# Altium PCB machnguon.PcbDoc
Units mm, origin at the board's own origin, x right, y up, seen from the top; angles counter-clockwise.
Board outline 35.56 x 32.38 mm, 2 copper layers (Top Layer, Bottom Layer); 12 components, 6 nets, 33 pads, 0 vias.
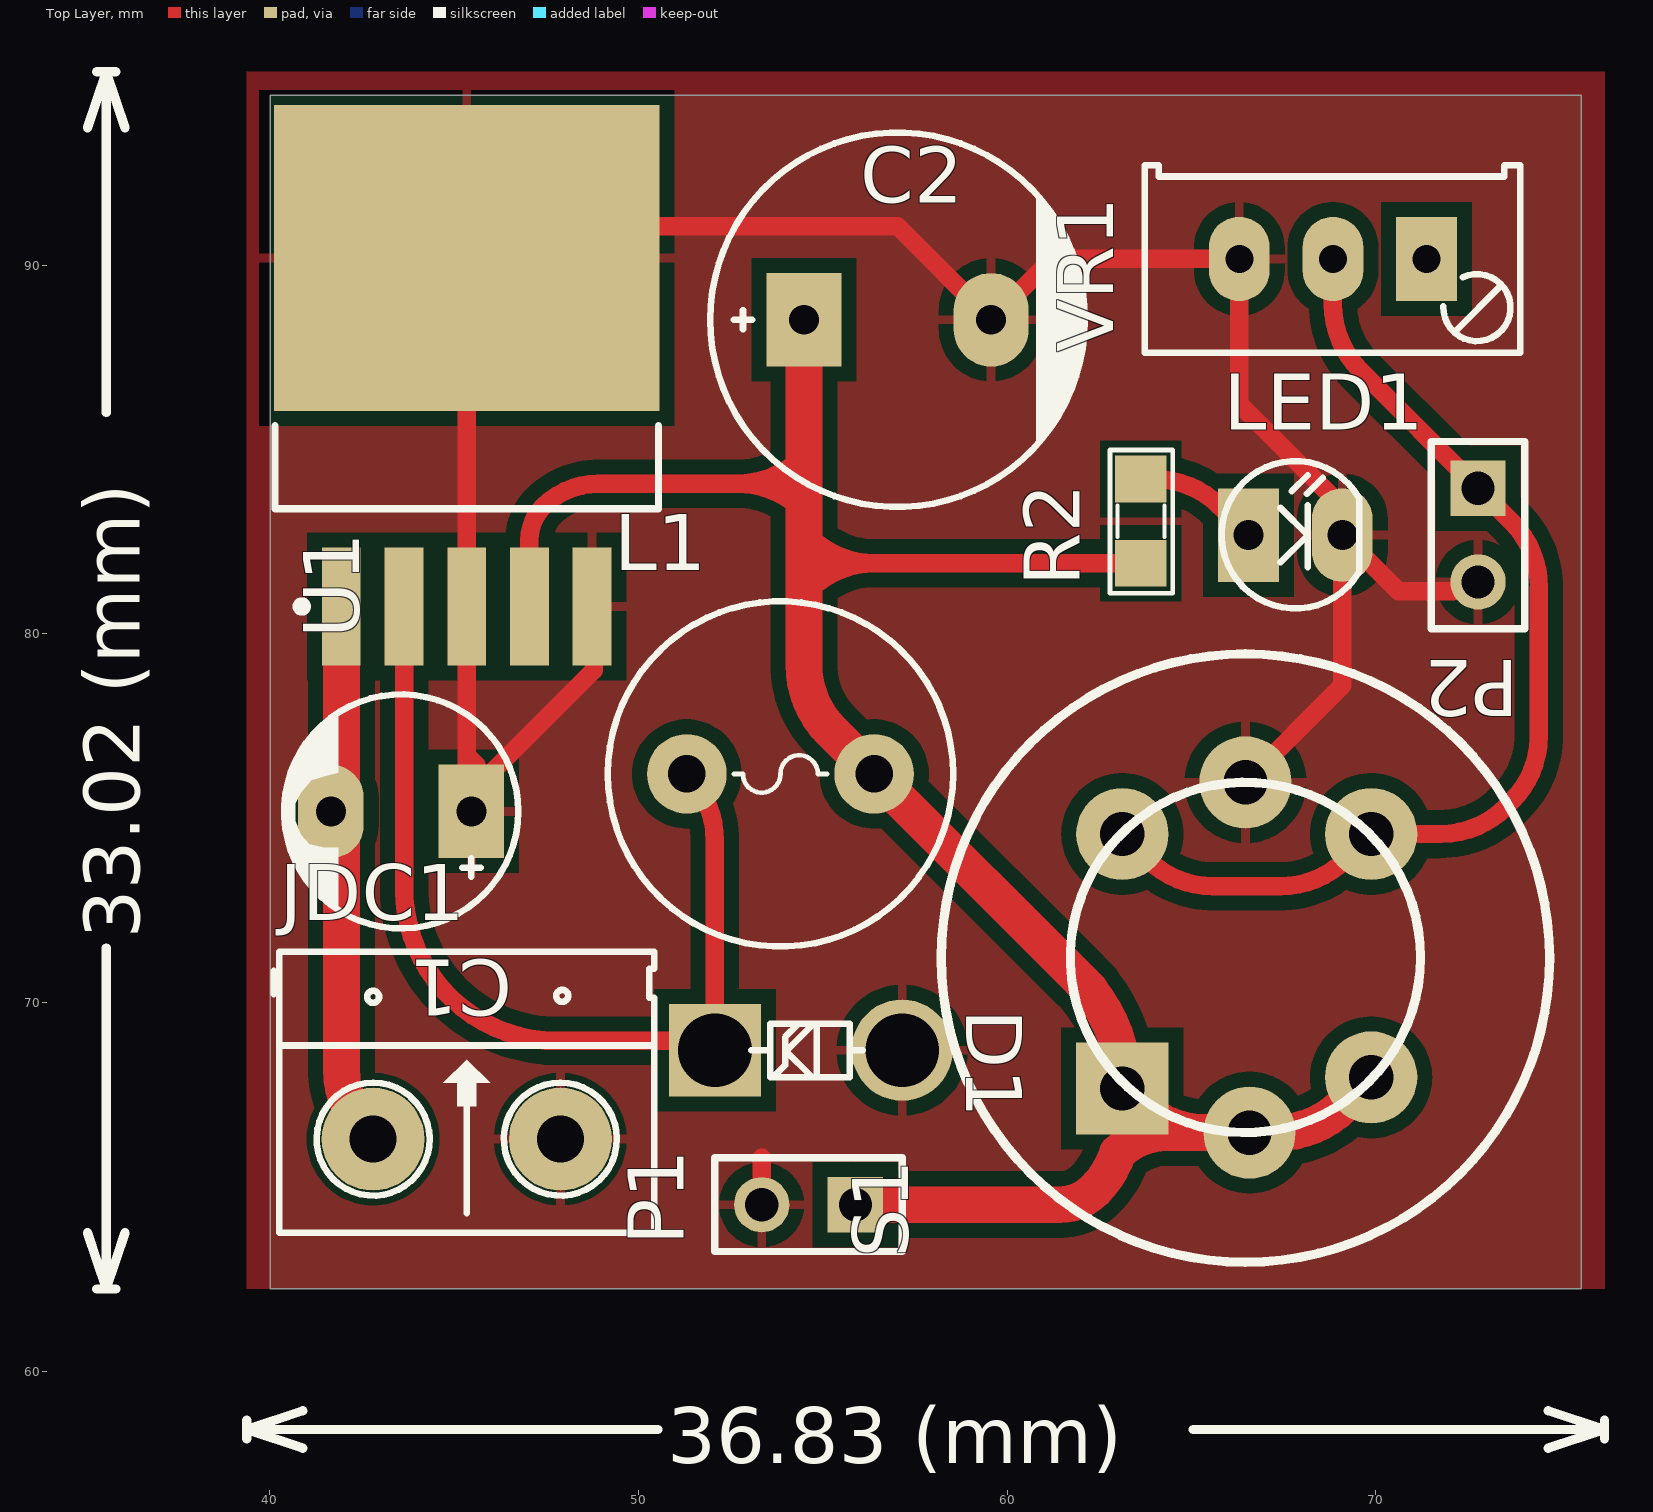
[diagram p0: Top Layer view]
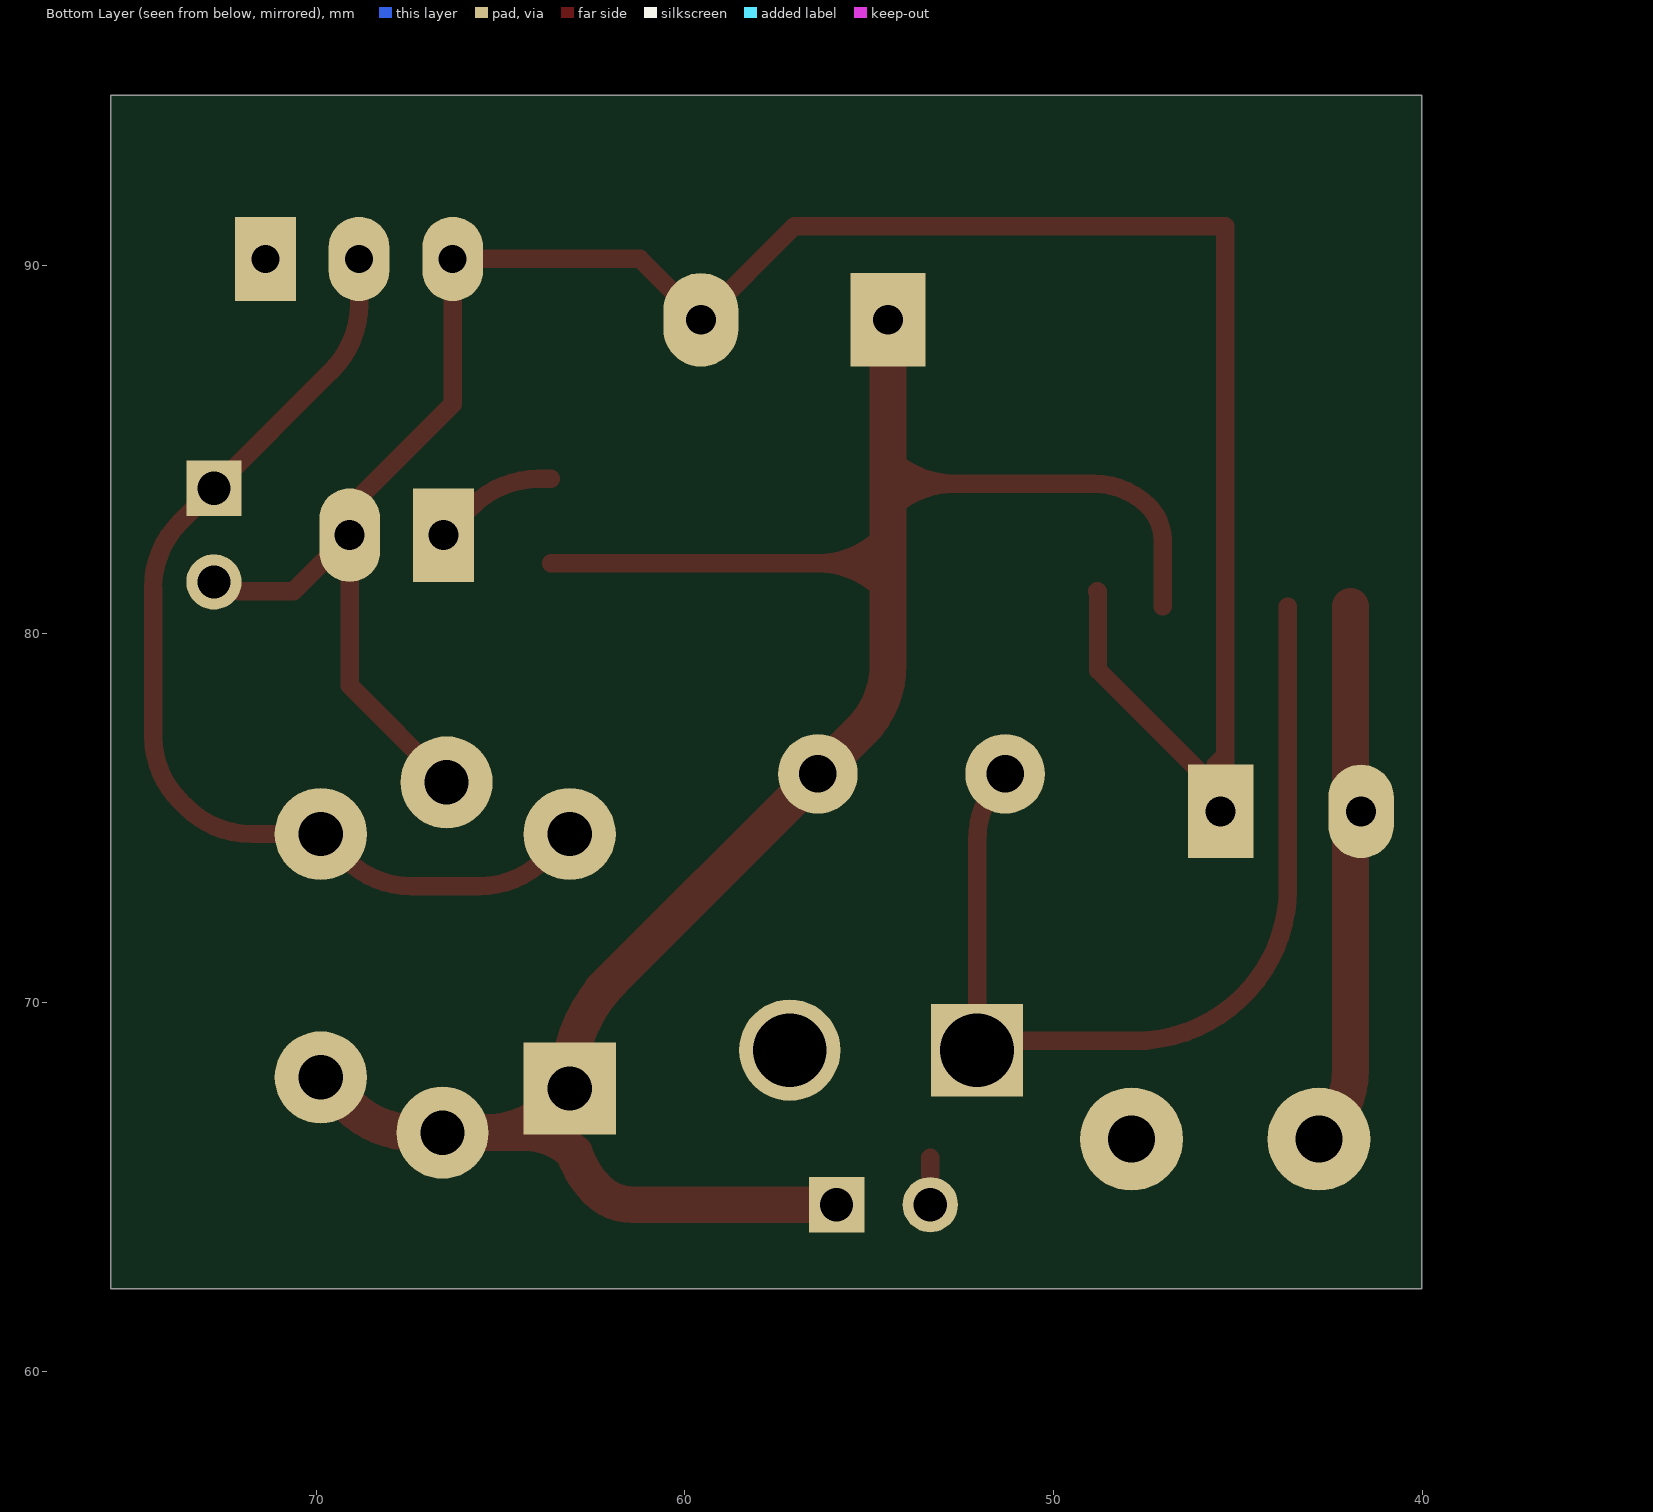
[diagram p1: Bottom Layer view, seen from below]

## Layer stack, top to bottom
Top Layer: signal copper 0.0356
Dielectric: dielectric 0.32, FR-4, Dk 4.8
Bottom Layer: signal copper 0.0356

## Board outline
40.005,94.615 40.005,62.23 75.565,62.23 75.565,94.615

## Design rules (kind name [scope] priority, off if disabled: settings)
Clearance [All] p1: gap=0.4
PolygonConnect [All] p1: connectstyle=Relief reliefconductorwidth=0.254 reliefentries=4 polygonreliefangle="90 Angle"
RoomDefinition machnguon [InComponentClass('machnguon')] p1: confinementstyle=ConfineIn formatcopy=TRUE lockcomponents=FALSE outline 178.943,26.924 281.559,26.924 281.559,46.609 178.943,46.609
RoutingLayers [All] p1: top layer_v5=TRUE bottom layer_v5=FALSE
RoutingVias [All] p1: holewidth=0.711 width=1.27 viastyle="Through Hole" minholewidth=0.711 minwidth=1.27 maxholewidth=0.711 maxwidth=1.27
SilkscreenOverComponentPads [All] p1: minsilkscreentomaskgap=0.254
SolderMaskExpansion [All] p1: expansion=0.102
Width [All] p1: maxlimit=1 minlimit=0.5 preferedwidth=0.5
26 further rules are at their usual default settings.

## Components (designator, comment, footprint, x,y, rotation, side; value= is the part's Value field where it differs from the comment)
C1 "Cap" CP1.5/2.5 45.466,75.184 r180 top
C2 "Cap Pol1" CP2/4 54.483,88.519 r0 top
D1 "1N5822" DZ0.5A 57.15,68.707 r0 top
JDC1 "Header 2" HED2 42.799,66.294 r0 top
L1 "100uH" L01 53.848,76.2 r0 top
LED1 "" LED-3 66.548,82.677 r0 top
P1 "Header 2" HDR1X2 55.88,64.516 r180 top
P2 "Header 2" HDR1X2 72.771,83.947 r270 top
R2 "1k" SM-0805 63.627,83.058 r90 top
S1 "MQ-6" MQ6 66.421,71.12 r90 top
U1 "LM2576T-5.0" TO170P1420-6N 45.339,86.741 r90 top
VR1 "10K" VR1 71.374,90.17 r180 top

## Footprints (in the part's own frame and the unit in brackets; to place one, negate y for a bottom-side part, rotate by r counter-clockwise, add the part's x,y. Pads: shape width x height; smd on the part's side, far side on the other; paste and mask are expansions set on the pad)
CP1.5/2.5 [mil] "Tu hoa 33 >100 uF,50V, 220uF/16V,25V ( it su dung )"
  rect 70x100 hole 32: 1(0,0)
  oval 70x100 hole 32: 2(150,0)
  silkscreen extent -50,-125 200,125, body extent -46,-121 202,127, height 434
CP2/4 [mil] "Tu hoa 1000uF/16V/25V"
  rect 80x100 hole 32: 1(0,0)
  oval 80x100 hole 32: 2(200,0)
  silkscreen extent -100,-200 300,200
DZ0.5A [mm] "Diode Zenner, W 80mil, L 300mil"
  round 2.75 hole 2: 1(0,0)
  rect 2.5x2.5 hole 2: 2(-5.08,0)
  silkscreen extent -4.09,-0.74 -1.07,0.71
HDR1X2 [mm] "Connector; Header; 2 Position"
  rect 1.5x1.5 hole 0.9: 1(0,0)
  round 1.5 hole 0.9: 2(2.54,0)
  silkscreen extent -1.27,-1.27 3.81,1.27
HED2 [mil] "Header 2, 2 pin, hight 300mil, Pin to Pin 200, Colour Green"
  round 110 hole 50: 1(0,0) 2(200,0)
  silkscreen extent -106,-100 300,200, body extent -92,-140 302,155, height 394
L01 [mil] "Inductor"
  round 85 hole 40: 1(-100,0) 2(100,0)
  silkscreen extent -184,-184 184,184
LED-3 [mil] "LED 2 PIN, 3ly Only colour"
  rect 65x100 hole 32: 1(0,0)
  oval 65x100 hole 32: 2(100,0)
  silkscreen extent -29,-78 118,79, body extent -13,-75 125,75, height 217
MQ6 [mm]
  rect 2.5x2.5 hole 1.2: 0(-3.45,3.3)
  round 2.5 hole 1.2: 1(-4.65,-0.15) 2(-3.15,-3.45) 3(3.45,3.3) 4(4.852,-0.039) 5(3.45,-3.45)
  silkscreen extent -8.17,-8.29 8.33,8.21
SM-0805 [mil] "Compoment SMD 80x50mil"
  rect 50x55 smd: 1(-45,0) 2(45,0)
  silkscreen extent -77,-34 76,33, body extent -40,-27 40,23, height 24
TO170P1420-6N [mm] "D2-PAK, 6-Leads, Body 8.9x10.1mm, Pitch 1.7mm, Lead Span 14.2mm, IPC Medium Density"
  rect 3.2x1.05 smd: 1(-6,3.4) 2(-6,1.7) 3(-6,0) 4(-6,-1.7) 5(-6,-3.4)
  rect 8.3x10.45 smd: 6(3.45,0)
  silkscreen extent -6.12,-5.2 -1.1,5.2, body extent -3.35,-5.2 6.05,5.2, height 4.65
VR1 [mil] "Variable Resistor"
  rect 65x90 hole 30: 1(0,0)
  oval 65x90 hole 30: 2(100,0) 3(200,0)
  silkscreen extent -100,-100 301,100, body extent -88,-130 288,110, height 455

## Part data
C1: "Capacitor"
C2: "Polarized Capacitor (Radial)"
D1: library part DZ, "Diode Zenner"
JDC1: library part Hed2, "Header 2 (Green)"
L1: library part L1, "Inductor"
LED1: library part LED, "LED Single colour Green and Red"
P1 P2: "Header, 2-Pin"
R2: library part R, "Resistor 1/4W"
S1: "Gas and Smoke Sensor"
U1: "SIMPLE SWITCHER; 3A Step-Down Voltage Regulator"
VR1: library part VR1, "Var Resistor"

## Nets (pads, with @x,y where several pads share a name; then routed paths per layer and width w, separated by ;. In a path a pad name is that pad's centre, name@x,y a point inside that pad or via, vN(x,y) a via of type N, cw(c..) or ccw(c..) an arc to the next point about the centre after c; other vN are vias at no path point)
5V: C2.1 L1.2 P1.1 R2.1 S1.0 S1.1 S1.2 U1.4 | length 69
  Top Layer w0.5: U1.4 47.039,82.55 cw(c48.317,82.55) 47.413,83.453 cw(c48.911,81.955) 48.911,84.074 52.669,84.074 ; 54.465,83.33 ccw(c52.669,81.534) 52.669,84.074 ; 54.465,84.818 cw(c52.669,86.614) 52.669,84.074 ; 54.483,82.804 54.654,82.633 ccw(c56.388,84.368) 56.388,81.915 ; 54.483,84.074 52.669,84.074 ; 54.61,81.915 56.388,81.915 ; 54.654,81.197 cw(c56.388,79.462) 56.388,81.915 ; P1.1 P1.1@55.88,65.024 ; R2.1 56.388,81.915
  Top Layer w1: C2.1 54.483,84.074 54.483,79.157 ccw(c57.023,79.157) 55.227,77.361 L1.2 62.25,70.338 ; P1.1 61.409,64.516 ccw(c61.409,65.885) 62.377,64.917 ccw(c60.581,66.713) 62.994,65.92 cw(c64.322,64.592) 64.322,66.47 S1.1@65.373,66.47 ; 61.976,70.612 cw(c59.148,67.784) S1.0@63.148,67.784 ; S1.0 63.577,67.214 ccw(c65.373,69.01) S1.1@65.373,66.47 ; S1.2@69.115,67.214 cw(c67.319,69.01) 67.319,66.47 S1.1 S1.1@65.373,66.47
12V: C1.2 JDC1.1 U1.1 | length 14.7
  Top Layer w1: U1.1 41.939,68.206 ccw(c44.479,68.206) 42.068,67.406 ccw(c44.479,68.206) 42.683,66.41 JDC1.1
GND: C1.1 C2.2 D1.1 JDC1.2 LED1.2 P1.2 P2.2 S1.4 U1.3 U1.5 U1.6 VR1.3 | length 69.5
  Top Layer w0.5: 45.387,76.66 45.593,76.454 C1.1@45.593,75.819 ; U1.5@48.806,81.153 48.791,81.138 48.791,79.017 C1.1@45.593,75.819 ; P1.2@53.213,64.389 P1.2 53.34,65.786 ; D1.1@56.261,68.707 D1.1 ; C2.2@59.563,88.697 C2.2 ; S1.4 69.088,78.6 LED1.2 ; LED1.2@69.469,83.058 LED1.2 ; P2.2 72.636,81.272 72.205,81.272 72.086,81.153 70.612,81.153 LED1.2 ; C1.1@45.593,75.819 45.339,76.073 45.339,91.059 57.023,91.059 C2.2 ; C2.2 61.214,90.17 VR1.3 66.294,86.233 69.088,83.439 LED1.2
NetD1_2: D1.2 L1.1 U1.2 | length 27.8
  Top Layer w0.5: 43.639,73.152 ccw(c47.791,73.113) 47.752,68.961 ; U1.2 43.639,72.983 ccw(c46.179,72.983) 43.685,72.502 ; 47.498,68.961 51.763,68.961 ccw(c51.763,69.395) D1.2@52.07,69.088 ; L1.1@51.181,76.835 51.181,76.327 L1.1 51.326,76.182 cw(c49.53,74.386) 52.07,74.386 D1.2@52.07,69.088 ; D1.2 D1.2@52.07,69.088
NetLED1_1: LED1.1 R2.2 | length 3.4
  Top Layer w0.5: R2.2 63.972,84.201 cw(c63.972,81.661) 65.768,83.457 LED1.1
OUT: P2.1 S1.3 S1.5 VR1.2 | length 28.8
  Top Layer w0.5: S1.3 63.795,73.896 ccw(c65.591,75.692) 65.591,73.152 67.401,73.152 ccw(c67.401,75.692) 69.197,73.896 S1.5 71.74,74.57 ccw(c71.74,77.11) 72.54,74.699 ccw(c71.74,77.11) 73.536,75.314 73.678,75.456 ccw(c71.882,77.252) 74.293,76.452 ccw(c71.882,77.252) 74.422,77.252 74.422,81.244 ccw(c71.882,81.244) 73.678,83.04 P2.1 69.578,87.14 cw(c71.374,88.936) 68.834,88.936 VR1.2
pads on no net: VR1.1

## Polygon pours and split planes (outlines as drawn)
GND on Top Layer "Bottom Layer-No Net" (solid, pour order 3): 39.37,95.25 76.2,95.25 76.2,62.23 39.37,62.23 39.37,95.25

## Silkscreen, mask and mechanical layers (free items; w line width, h text height)
Top Overlay:
  lines w0.254: 35.052,63.754 35.56,62.23 ; 35.052,93.726 35.56,95.25 ; 35.306,62.23 35.814,62.23 ; 35.306,95.25 35.814,95.25 ; 35.56,71.478 35.56,62.23 ; 35.56,86.002 35.56,95.25 ; 36.068,63.754 35.56,62.23 ; 36.068,93.726 35.56,95.25 ; 39.37,58.166 39.37,58.674 ; 40.894,57.912 39.37,58.42 ; 40.894,58.928 39.37,58.42 ; 50.523,58.42 39.37,58.42 ; 65.047,58.42 76.2,58.42 ; 74.676,57.912 76.2,58.42 ; 74.676,58.928 76.2,58.42 ; 76.2,58.166 76.2,58.674
  text "33.02 (mm)" at 36.474,71.732 h1.52 r90
  text "36.83 (mm)" at 50.777,57.506 h1.52